# Altium PCB PCB4.PcbDoc
Units mil, origin at the board's own origin, x right, y up, seen from the top; angles counter-clockwise.
Board outline 3370.08 x 2125.2 mil, 2 copper layers (Top Layer, Bottom Layer); 37 components, 0 nets, 137 pads, 19 vias.
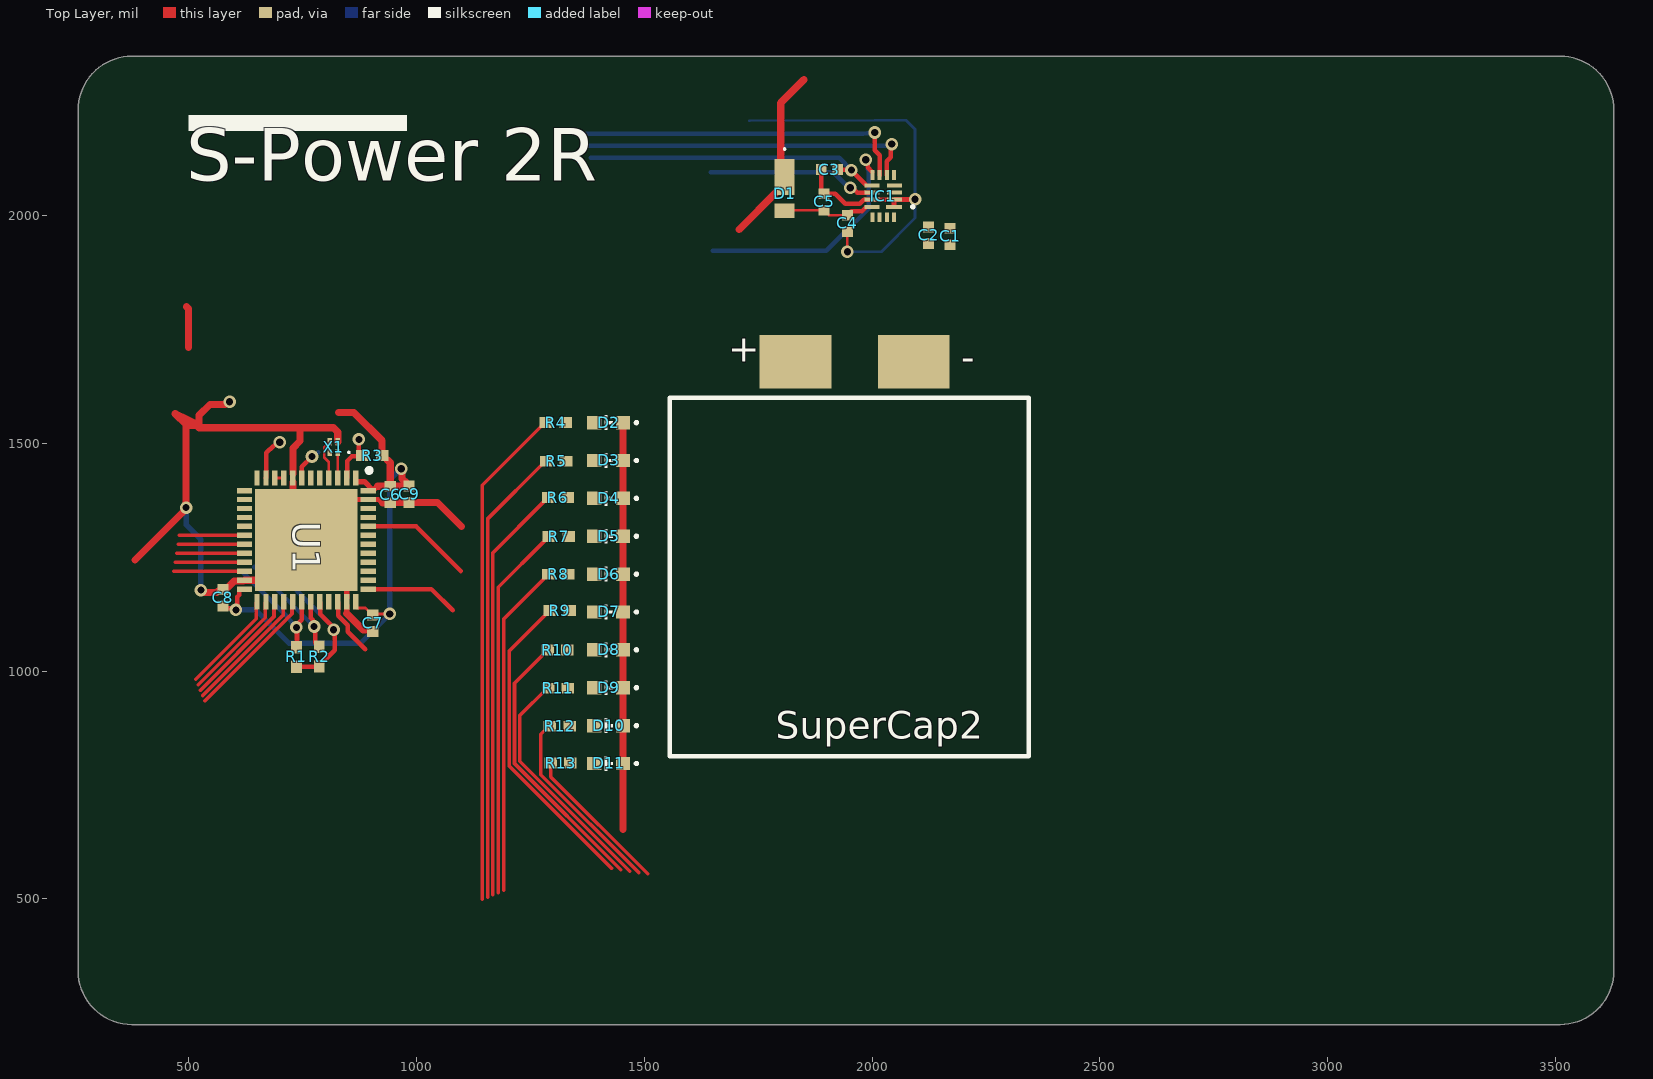
[diagram p0: Top Layer view]
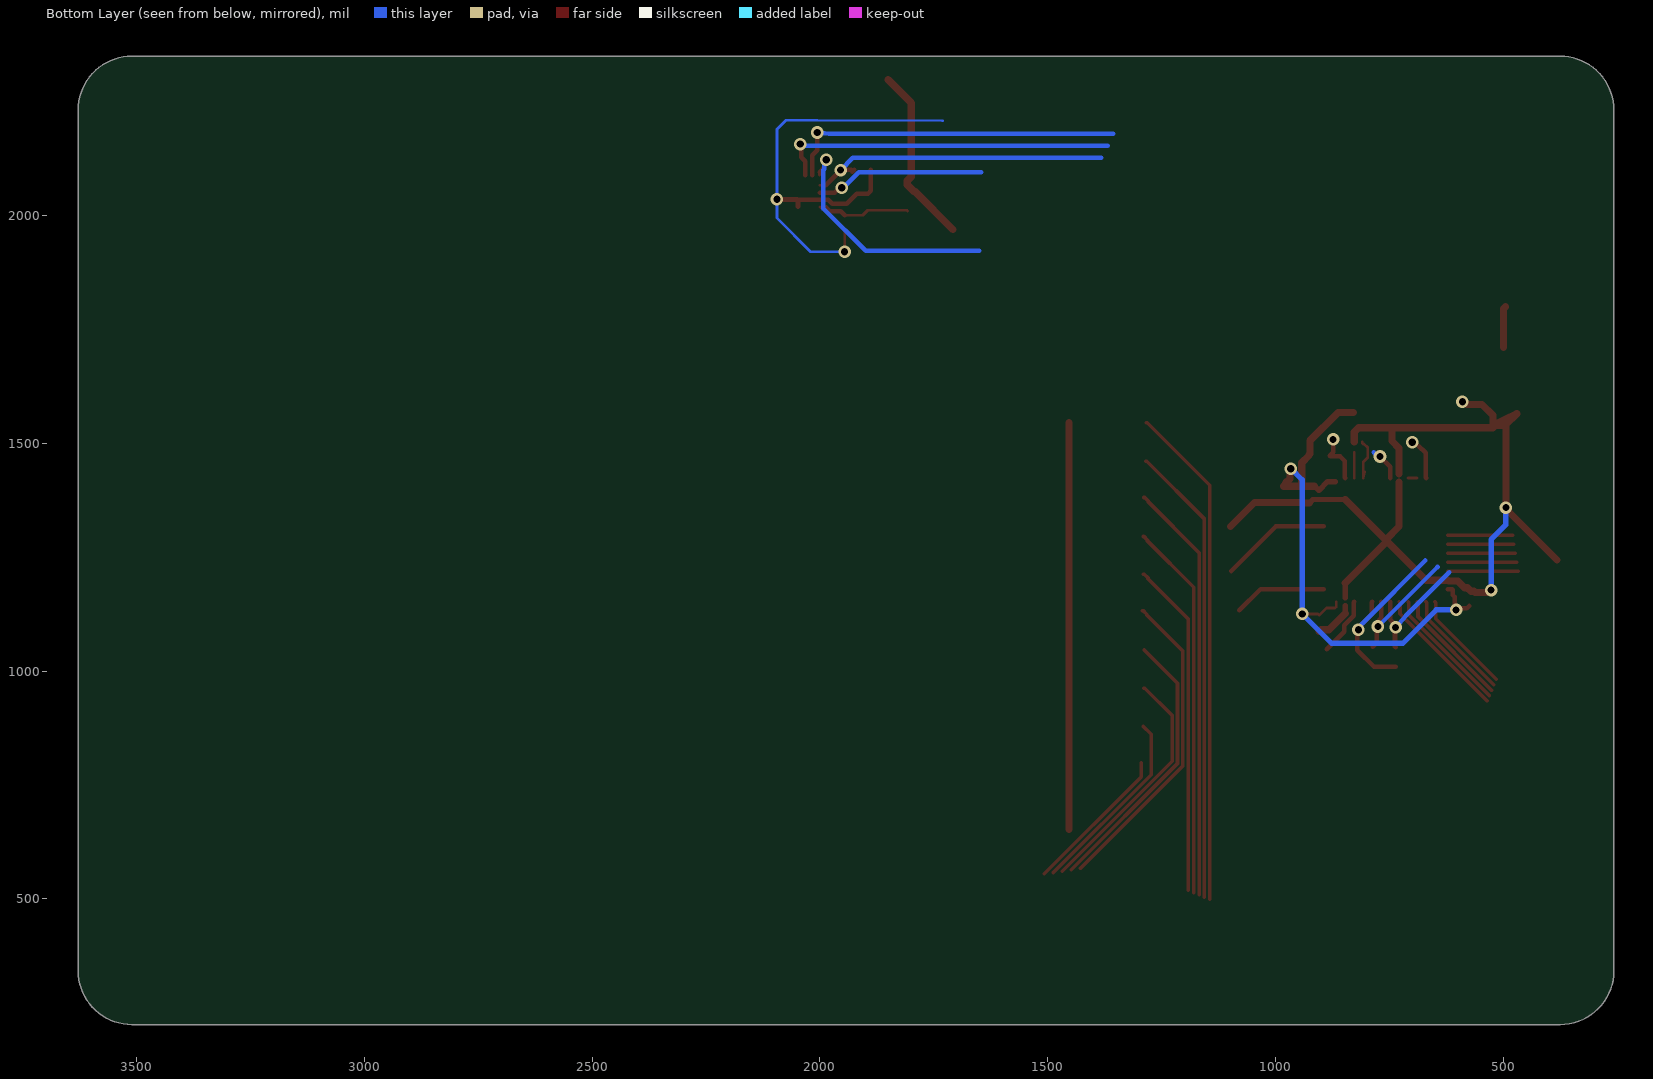
[diagram p1: Bottom Layer view, seen from below]

## Layer stack, top to bottom
Top Solder: solder mask 0.4, Solder Resist, Dk 3.5
Top Layer: signal copper 1.4
Dielectric 1: dielectric 12.6, FR-4, Dk 4.8
Bottom Layer: signal copper 1.4
Bottom Solder: solder mask 0.4, Solder Resist, Dk 3.5

## Board outline
257.87,342.2 257.87,2231.18 cw(c375.98,2231.18) 375.98,2349.29 3509.84,2349.29 cw(c3509.84,2231.18) 3627.95,2231.18 3627.95,342.2 cw(c3509.84,342.2) 3509.84,224.09 375.98,224.09 cw(c375.98,342.2)

## Design rules (kind name [scope] priority, off if disabled: settings)
Clearance [All] p1: gap=10 ignorepadtopadclearanceinfootprint=FALSE except(0: Arc-Hole Track-Hole SMDPad-Hole THPad-Hole Via-Hole Fill-Hole Poly-Hole Region-Hole Text-Hole)
PolygonConnect [All] p1: connectstyle=Relief reliefconductorwidth=10 reliefentries=4 polygonreliefangle="90 Angle" airgapwidth=10
RoutingVias [All] p1: holewidth=28 width=50 viastyle="Through Hole" minholewidth=28 minwidth=50 maxholewidth=28 maxwidth=50
SolderMaskExpansion [All] p1: expansion=4 istentingtop=FALSE
Width [All] p1: maxlimit=10 minlimit=10 preferedwidth=10
30 further rules are at their usual default settings.

## Components (designator, comment, footprint, x,y, rotation, side; value= is the part's Value field where it differs from the comment)
C1 "GRM155C81C474KE01D" CAPC1005X70N 2171.26,1953.54 r270 top value=0F
C2 "GRM155C81C474KE01D" CAPC1005X70N 2124.02,1956.5 r270 top value=0F
C3 "GRM155R61E105KA12D" CAPC1005X55N 1906.5,2100.2 r180 top value=1µF
C4 "C0402C101KCGACAUTO" CAPC1005X70N 1945.87,1982.09 r90 top
C5 "C0402C101KCMBASJ105SB7474KFNA01GACAUTO" CAPC1005X70N 1894.69,2029.33 r270 top
C6 "C0402C475K8PACTU" CAPC1005X70N 942.68,1387.13 r270 top
C7 "MLAST105SB5104KFNA01" CAPC1005X70N 904.29,1104.65 r270 top
C8 "MLAST105SB5104KFNA01" CAPC1005X70N 575.55,1160.75 r90 top
C9 "MLAST105SB5104KFNA01" CAPC1005X70N 984.02,1388.11 r270 top
D1 "RBE01VYM6AFHTR" RBE01VYM6AFHTR 1808.07,2058.86 r180 top
D2 "150060RS55040" WL-SMCD_0603 -48578.07,-48454.92 r180 top
D3 "150060RS55040" WL-SMCD_0603 -48578.07,-48538.04 r180 top
D4 "150060AS55040" WL-SMCD_0603 -48578.07,-48621.15 r180 top
D5 "150060AS55040" WL-SMCD_0603 -48578.07,-48704.27 r180 top
D6 "150060AS55040" WL-SMCD_0603 -48578.07,-48787.38 r180 top
D7 "150060VS55040" WL-SMCD_0603 -48578.07,-48870.49 r180 top
D8 "150060VS55040" WL-SMCD_0603 -48578.07,-48953.61 r180 top
D9 "150060VS55040" WL-SMCD_0603 -48578.07,-49036.72 r180 top
D10 "150060VS55040" WL-SMCD_0603 -48578.07,-49119.84 r180 top
D11 "150060BS55040" WL-SMCD_0603 -48578.07,-49202.95 r180 top
IC1 "NTP53321G0JHKZ" NTP53321G0JHKZ 2024.61,2042.13 r180 top
R1 "CRCW04024K70FKEDHP" RESC1005X40N 736.97,1030.83 r270 top
R2 "CRCW04024K70FKEDHP" RESC1005X40N 787.17,1031.81 r270 top
R3 "CRCW04024K70FKEDHP" RESC1005X40N 903.31,1472.76 r0 top
R4 "SFR01MZPJ470" RESC1005X40N 1305.79,1545.08 r180 top
R5 "SFR01MZPJ470" RESC1005X40N 1306.77,1460.43 r180 top
R6 "SFR01MZPJ470" RESC1005X40N 1310.71,1380.71 r0 top
R7 "SFR01MZPJ470" RESC1005X40N 1312.68,1295.08 r0 top
R8 "SFR01MZPJ470" RESC1005X40N 1311.69,1212.4 r0 top
R9 "SFR01MZPJ470" RESC1005X40N 1314.65,1132.68 r0 top
R10 "SFR01MZPJ470" RESC1005X40N 1309.72,1046.06 r0 top
R11 "SFR01MZPJ470" RESC1005X40N 1310.71,962.4 r0 top
R12 "SFR01MZPJ470" RESC1005X40N 1314.65,878.74 r0 top
R13 "SFR01MZPJ470" RESC1005X40N 1316.61,798.03 r0 top
SuperCap2 "S-Power 2R" "S-Power 2R" 1950,1600 r0 top
U1 "STM32L431CCU6" QFN50P700X700X60-49N-D 758.62,1287.72 r270 top
X1 "WMRAG32K76CS2C00R0" WMRAG32K76CS2C00R0 818.66,1491.46 r90 top

## Footprints (in the part's own frame and the unit in brackets; to place one, negate y for a bottom-side part, rotate by r counter-clockwise, add the part's x,y. Pads: shape width x height; smd on the part's side, far side on the other; paste and mask are expansions set on the pad)
CAPC1005X55N [mm]
  rect 0.6x0.62 smd: 1(-0.46,0) 2(0.46,0)
  body extent -0.5,-0.25 0.5,0.25, height 0.25
CAPC1005X70N [mm]
  rect 0.6x0.62 smd: 1(-0.46,0) 2(0.46,0)
  body extent -0.5,-0.25 0.5,0.25, height 0.5
NTP53321G0JHKZ [mm]
  rect 0.9x0.22 smd: 1(-0.6,0.6)
  rect 0.85x0.22 smd: 2(-0.625,0.2) 3(-0.625,-0.2) 4(-0.625,-0.6) 9(0.625,-0.6) 10(0.625,-0.2) 11(0.625,0.2) 12(0.625,0.6)
  rect 0.22x0.55 smd: 5(-0.6,-1.175) 6(-0.2,-1.175) 7(0.2,-1.175) 8(0.6,-1.175) 13(0.6,1.175) 14(0.2,1.175) 15(-0.2,1.175) 16(-0.6,1.175)
  silkscreen extent -1.7,0.55 -1.6,0.65, body extent -0.9,-1.3 0.9,1.3, height 0.6
QFN50P700X700X60-49N-D [mm]
  rect 0.85x0.3 smd: 1(-3.45,2.75) 2(-3.45,2.25) 3(-3.45,1.75) 4(-3.45,1.25) 5(-3.45,0.75) 6(-3.45,0.25) 7(-3.45,-0.25) 8(-3.45,-0.75) 9(-3.45,-1.25) 10(-3.45,-1.75) 11(-3.45,-2.25) 12(-3.45,-2.75) 25(3.45,-2.75) 26(3.45,-2.25) 27(3.45,-1.75) 28(3.45,-1.25) 29(3.45,-0.75) 30(3.45,-0.25) 31(3.45,0.25) 32(3.45,0.75) 33(3.45,1.25) 34(3.45,1.75) 35(3.45,2.25) 36(3.45,2.75)
  rect 0.3x0.85 smd: 13(-2.75,-3.45) 14(-2.25,-3.45) 15(-1.75,-3.45) 16(-1.25,-3.45) 17(-0.75,-3.45) 18(-0.25,-3.45) 19(0.25,-3.45) 20(0.75,-3.45) 21(1.25,-3.45) 22(1.75,-3.45) 23(2.25,-3.45) 24(2.75,-3.45) 37(2.75,3.45) 38(2.25,3.45) 39(1.75,3.45) 40(1.25,3.45) 41(0.75,3.45) 42(0.25,3.45) 43(-0.25,3.45) 44(-0.75,3.45) 45(-1.25,3.45) 46(-1.75,3.45) 47(-2.25,3.45) 48(-2.75,3.45)
  rect 5.7x5.7 smd: 49(0,0)
  silkscreen extent -4,3.38 -3.75,3.63, body extent -3.55,-3.55 3.55,3.55, height 0.6
RBE01VYM6AFHTR [mm]
  rect 1.1x2 smd: 1(0,-0.65)
  rect 1.1x0.8 smd: 2(0,1.25)
  silkscreen extent -0.05,-2.25 0.05,-2.15, body extent -0.7,-1.25 0.7,1.25, height 0.8
RESC1005X40N [mm]
  rect 0.7x0.6 smd: 1(-0.55,0) 2(0.55,0)
  body extent -0.5,-0.25 0.5,0.25, height 0.4
"S-Power 2R" [mm]
  rect 4x3 smd: 1(-3,2) 2(3.6,2)
  silkscreen extent -10,-20 10,0
WL-SMCD_0603 [mm] "SMD Mono-color Chip LED, body 1.6x0.8mm"
  rect 0.8x0.75 smd: 1(-1270.8,-1270) 2(-1269.2,-1270)
  silkscreen extent -1271.63,-1270.4 -1269.78,-1269.6, body extent -1270.8,-1270.4 -1269.2,-1269.6, height 0.42
WMRAG32K76CS2C00R0 [mm]
  rect 0.4x0.25 smd: 1(-0.3,-0.225) 2(0.3,-0.225) 3(0.3,0.225) 4(-0.3,0.225)
  silkscreen extent -0.35,-0.9 -0.25,-0.8, body extent -0.48,-0.33 0.48,0.33, height 0.45

## Part data
C1 C2: library part CMP-001-00140-1, "Multilayer Ceramic Capacitors MLCC - SMD/SMT", Manufacturer_Name="Murata Electronics", Mouser Part Number=81-GRM155C81C474KE1D, Datasheet Link=https://search.murata.co.jp/Ceramy/image/img/A01X/G101/ENG/GRM155C81C474KE01-01A.pdf, Design Item ID=GRM155C81C474KE01D, Height=0.7mm, Manufacturer_Part_Number=GRM155C81C474KE01D, Mouser Price/Stock=https://www.mouser.com/Search/Refine.aspx?Keyword=81-GRM155C81C474KE1D, Source=SamacSys.SchLib
C3: library part CMP-001-00126-1, "Capacitor", Manufacturer_Name="Murata Electronics", Mouser Part Number=81-GRM155R61E105KA2D, Rated Voltage="25 VDC", Arrow Part Number=GRM155R61E105KA12D, Arrow Price/Stock=https://www.arrow.com/en/products/grm155r61e105ka12d/murata-manufacturing?region=nac, Datasheet Link=https://search.murata.co.jp/Ceramy/image/img/A01X/G101/ENG/GRM155R61E105KA12-01A.pdf, Design Item ID=GRM155R61E105KA12D, Height=0.55mm, Manufacturer_Part_Number=GRM155R61E105KA12D, Mouser Price/Stock=https://www.mouser.co.uk/ProductDetail/Murata-Electronics/GRM155R61E105KA12D?qs=hiffU4J9V6bE4a81t2Mv5A%3D%3D, Source=SamacSys.SchLib
C4: library part "Generic capacitor", "Multilayer Ceramic Capacitors MLCC - SMD/SMT 500V 0.0001uF C0G 0402 10% AEC-Q200", Capacitance=100pF, ComponentLink1Description="New link", ComponentLink1URL=https://www.mouser.se/ProductDetail/KEMET/C0402C101KCGACAUTO?qs=1Kr7Jg1SGW8kQysZZQPmCw%3D%3D
C5: library part "Generic capacitor", "Multilayer Ceramic Capacitors MLCC - SMD/SMT 500V 0.0001uF C0G 0402 10% AEC-Q200", Capacitance=0.47uF, ComponentLink1Description="New link", ComponentLink1URL=https://www.mouser.se/ProductDetail/TAIYO-YUDEN/MBASJ105SB7474KFNA01?qs=tlsG%2FOw5FFh70%252Bw5vm%252Bxgg%3D%3D
C6: library part "Generic capacitor", "Multilayer Ceramic Capacitors MLCC - SMD/SMT", Capacitance=4.7uF, ComponentLink1Description="New link", ComponentLink1URL=https://www.mouser.se/ProductDetail/TAIYO-YUDEN/MLASJ105BB5475MFNA01?qs=sGAEpiMZZMsh%252B1woXyUXj3XUfju0vRpjpyIV14TsoXE%3D
C7 C8 C9: library part "Generic capacitor", "Multilayer Ceramic Capacitors MLCC - SMD/SMT 25V 0.1uF X5R 0402 10% Medical", Capacitance=100nF, ComponentLink1Description="New link", ComponentLink1URL=https://www.mouser.se/ProductDetail/TAIYO-YUDEN/MLAST105SB5104KFNA01?qs=sGAEpiMZZMsh%252B1woXyUXj3XUfju0vRpjIEu19pL458I%3D
D1: library part CMP-004-00062-1, "DIODE SCHOTTKY 6V 100MA TUMD2M", Manufacturer_Name="ROHM Semiconductor", Mouser Part Number=755-RBE01VYM6AFHTR, Datasheet Link=https://www.digikey.ph/en/products/detail/rohm-semiconductor/RBE01VYM6AFHTR/24634517, Design Item ID=RBE01VYM6AFHTR, Height=0.8mm, Manufacturer_Part_Number=RBE01VYM6AFHTR, Mouser Price/Stock=https://www.mouser.co.uk/ProductDetail/ROHM-Semiconductor/RBE01VYM6AFHTR?qs=VVKQmw408U8czvswzPLZtQ%3D%3D, Source=SamacSys.SchLib
D2 D3: library part CMP-207942-000007-3, "LED RED DIFFUSED 0603 SMD", Case/Package=0603, Color=Red, Forward Current=40mA, Forward Voltage=2V, Max Junction Temperature (Tj)=115°C, Max Operating Temperature=85°C, Max Reverse Voltage (DC)=5V, Min Operating Temperature=-40°C, Power Dissipation=48mW, Dominant Wavelength=624nm, Height=400µm, Length=1.6mm, Luminous Intensity=90mcd, NexarPartId=90235565, Packaging="Tape and Reel", Peak Wavelength=632nm, Reverse Voltage=5V, RoHS=Compliant, Viewing Angle=140°, Wavelength=624nm, Width=800µm
D4 D5 D6: library part CMP-03913-134708025-1, "150060AS55040 WL-SMCD SMT Mono-color Chip LED Diffused", Forward Current=40mA, Forward Voltage=2V, Max Operating Temperature=85°C, Max Reverse Voltage (DC)=5V, Min Operating Temperature=-40°C, Dominant Wavelength=605nm, Luminous Intensity=110mcd, NexarPartId=134708025, Peak Wavelength=609nm, Viewing Angle=140°
D7 D8 D9 D10: library part CMP-03913-90235568-2, "150060VS55040 WL-SMCD SMT Mono-color Chip LED Diffused", Case/Package=0603, Color=Green, Forward Current=40mA, Forward Voltage=2V, Max Junction Temperature (Tj)=115°C, Max Operating Temperature=85°C, Max Reverse Voltage (DC)=5V, Min Operating Temperature=-40°C, Power Dissipation=48mW, Dominant Wavelength=573nm, Height=400µm, Length=1.6mm, Luminous Intensity=60mcd, NexarPartId=90235568, Packaging="Tape and Reel", Peak Wavelength=575nm, Reverse Voltage=5V, RoHS=Compliant, Viewing Angle=140°, Wavelength=573nm, Width=800µm
D11: library part CMP-03913-90235561-2, "150060BS55040 WL-SMCD SMT Mono-color Chip LED Diffused", Forward Current=60mA, Forward Voltage=3.2V, Max Operating Temperature=85°C, Max Reverse Voltage (DC)=5V, Min Operating Temperature=-40°C, Dominant Wavelength=470nm, Height=400µm, Length=1.6mm, Luminous Intensity=80mcd, NexarPartId=90235561, Packaging="Tape and Reel", Peak Wavelength=465nm, RoHS=Compliant, Viewing Angle=140°, Wavelength=470nm, Width=800µm
IC1: library part CMP-031-00011-1, "Interface - Specialized NTAG", Manufacturer_Name=NXP, Mouser Part Number=771-NTP53321G0JHKZ, Arrow Part Number=NTP53321G0JHKZ, Arrow Price/Stock=https://www.arrow.com/en/products/ntp53321g0jhkz/nxp-semiconductors?region=nac, Datasheet Link=https://www.nxp.com/docs/en/data-sheet/NTP53x2.pdf, Design Item ID=NTP53321G0JHKZ, Height=0.5mm, Manufacturer_Part_Number=NTP53321G0JHKZ, Mouser Price/Stock=https://www.mouser.co.uk/ProductDetail/NXP-Semiconductors/NTP53321G0JHKZ?qs=u16ybLDytRYy2Rt%2Fib73Dw%3D%3D, Source=SamacSys.SchLib
R1 R2 R3: library part CMP-009-00230-1, "CRCW Power Resistor 0402 0.063W 4K7 Vishay CRCW Series Thick Film Power Resistor 0402 Case 4.7k +/-1% 0.125W +/-100ppm/K", Manufacturer_Name=Vishay, Mouser Part Number=71-CRCW04024K70FKEDH, Resistance=4.7k, Arrow Part Number=CRCW04024K70FKEDHP, Arrow Price/Stock=https://www.arrow.com/en/products/crcw04024k70fkedhp/vishay?utm_currency=USD&region=nac, Datasheet Link=http://www.vishay.com/docs/20035/dcrcwe3.pdf, Design Item ID=CRCW04024K70FKEDHP, Height=0.4mm, Manufacturer_Part_Number=CRCW04024K70FKEDHP, Mouser Price/Stock=https://www.mouser.co.uk/ProductDetail/Vishay-Dale/CRCW04024K70FKEDHP?qs=k2%2FDWSARqgH3ASlI4vM3KQ%3D%3D, Source=SamacSys.SchLib
R4 R5 R6 R7 R8 R9 R10 R11 R12 R13: library part "Generic resistor", "Thick Film Resistors Sulfur Tolerant Chip Resistors 0402 case size", Resistance=47, ComponentLink1Description="New link", ComponentLink1URL=https://www.mouser.se/ProductDetail/ROHM-Semiconductor/SFR01MZPJ470?qs=sGAEpiMZZMvdGkrng054t2cqbZCzJY7NKh3gUwXOa5kuN5TNJ%252Bi2TA%3D%3D
SuperCap2: library part CMP-111-000001-1, Design Item ID="S-Power 2R", Source=Schlib.SchLib
U1: library part CMP-031-00018-1, "ARM Microcontrollers - MCU 16/32-BITS MICROS", Manufacturer_Name=STMicroelectronics, Mouser Part Number=511-STM32L431CCU6, Arrow Part Number=STM32L431CCU6, Arrow Price/Stock=https://www.arrow.com/en/products/stm32l431ccu6/stmicroelectronics?region=nac, Datasheet Link=http://www.st.com/content/ccc/resource/technical/document/datasheet/group3/83/b3/60/f6/b1/cc/47/7e/DM00257211/files/DM00257211.pdf/jcr:content/translations/en.DM00257211.pdf, Design Item ID=STM32L431CCU6, Height=0.6mm, Manufacturer_Part_Number=STM32L431CCU6, Mouser Price/Stock=https://www.mouser.co.uk/ProductDetail/STMicroelectronics/STM32L431CCU6?qs=U58vgkJzipRWiXTJcDrRbg%3D%3D, Source=SamacSys.SchLib
X1: library part CMP-003-00031-1, "32.768 kHz +/-20ppm Crystal 8pF 75 kOhms 4-SMD", Manufacturer_Name="Murata Electronics", Mouser Part Number=81-WMRAG32K76CS2C00R, Datasheet Link=https://www.murata.com/products/productdata/8804604674078/SPEC-WMRAG32K76CS2C00R0.pdf, Design Item ID=WMRAG32K76CS2C00R0, Height=0.35mm, Manufacturer_Part_Number=WMRAG32K76CS2C00R0, Mouser Price/Stock=https://www.mouser.co.uk/ProductDetail/Murata-Electronics/WMRAG32K76CS2C00R0?qs=bZr6mbWTK5kWV2uyypDEfg%3D%3D, Source=SamacSys.SchLib

## Via types
v1: diameter 27.56, hole 15.75, Top Layer to Bottom Layer, tented both sides, 19 vias

## Nets (pads, with @x,y where several pads share a name; then routed paths per layer and width w, separated by ;. In a path a pad name is that pad's centre, name@x,y a point inside that pad or via, vN(x,y) a via of type N, cw(c..) or ccw(c..) an arc to the next point about the centre after c; other vN are vias at no path point)
pads on no net: C1.1 C1.2 C2.1 C2.2 C3.1 C3.2 C4.1 C4.2 C5.1 C5.2 C6.1 C6.2 C7.1 C7.2 C8.1 C8.2 C9.1 C9.2 D1.1 D1.2 D2.1 D2.2 D3.1 D3.2 D4.1 D4.2 D5.1 D5.2 D6.1 D6.2 D7.1 D7.2 D8.1 D8.2 D9.1 D9.2 D10.1 D10.2 D11.1 D11.2 IC1.1 IC1.2 IC1.3 IC1.4 IC1.5 IC1.6 IC1.7 IC1.8 IC1.9 IC1.10 IC1.11 IC1.12 IC1.13 IC1.14 IC1.15 IC1.16 R1.1 R1.2 R2.1 R2.2 R3.1 R3.2 R4.1 R4.2 R5.1 R5.2 R6.1 R6.2 R7.1 R7.2 R8.1 R8.2 R9.1 R9.2 R10.1 R10.2 R11.1 R11.2 R12.1 R12.2 R13.1 R13.2 SuperCap2.1 SuperCap2.2 U1.1 U1.2 U1.3 U1.4 U1.5 U1.6 U1.7 U1.8 U1.9 U1.10 U1.11 U1.12 U1.13 U1.14 U1.15 U1.16 U1.17 U1.18 U1.19 U1.20 U1.21 U1.22 U1.23 U1.24 U1.25 U1.26 U1.27 U1.28 U1.29 U1.30 U1.31 U1.32 U1.33 U1.34 U1.35 U1.36 U1.37 U1.38 U1.39 U1.40 U1.41 U1.42 U1.43 U1.44 U1.45 U1.46 U1.47 U1.48 U1.49 X1.1 X1.2 X1.3 X1.4
copper on no net: | length 20622.4
  Top Layer w6.06: 575.55,1142.64 575.94,1142.64 ; 689.72,1423.54 709.41,1423.54 ; 804.96,1437.24 807.83,1423.54 807.83,1458.86 797.91,1468.79 797.91,1490.41 805.93,1498.43 807.91,1498.43 809.8,1500.32 809.8,1503.27 ; 827.52,1423.54 827.52,1479.65 ; 866.89,1151.89 866.89,1141.06 869.76,1138.19 888.46,1138.19 903.9,1122.76 904.29,1122.76 906.85,1125.32 v1(941.69,1125.32) ; 1808.07,2009.65 1809.65,2011.22 1894.69,2011.22 1895.08,2011.22 1906.1,2000.2 1945.87,2000.2 ; v1(1945.87,1920.08) 1945.87,1963.98 ; v1(1954.66,2099.28) 1954.66,2095.34 1957.68,2092.32 v1@1961.02,2092.32 ; v1(1986.22,2121.85) v1@1990.33,2117.74 ; 1986.3,2017.2 1998.7,2017.2 2000,2018.5 ; 1987.6,2065.75 2000,2065.75 ; 2000.98,2088.39 2000.98,2094.88
  Top Layer w7.87: 468.27,1218.82 622.8,1218.82 ; 471.25,1238.5 622.8,1238.5 ; 474.23,1258.19 622.8,1258.19 ; 477.21,1277.87 622.8,1277.87 ; 480.08,1297.56 622.8,1297.56 ; 515.63,981.73 648.39,1114.49 648.39,1149.92 650.35,1151.89 ; 521.54,969.92 668.2,1116.58 668.2,1150.05 670.04,1151.89 ; 526.46,958.11 687.76,1119.41 687.76,1149.92 689.72,1151.89 ; 531.35,946.3 708.4,1123.35 708.4,1150.88 709.41,1151.89 ; 536.24,934.49 727.13,1125.37 727.13,1149.92 729.09,1151.89 ; 1144.49,498.76 1144.49,1407.4 1282.17,1545.08 1284.13,1545.08 ; 1156.3,503.65 1156.3,1333.58 1283.15,1460.43 1285.12,1460.43 ; 1168.11,508.54 1168.11,1259.76 1279.21,1370.87 1279.21,1372.83 1287.09,1380.71 1289.06,1380.71 ; 1179.92,513.46 1179.92,1183.98 1281.18,1285.24 1281.18,1287.2 1289.06,1295.08 1291.02,1295.08 ; 1191.73,519.37 1191.73,1114.09 1280.2,1202.56 1280.2,1204.53 1288.07,1212.4 1290.04,1212.4 ; 1288.07,1046.06 1215.35,973.35 1215.35,796.9 1448.5,563.75 ; 1289.06,962.4 1287.09,962.4 1227.17,902.48 1227.17,801.79 1468.19,560.77 ; 1291.02,878.74 1273.31,861.02 1273.31,772.35 1487.87,557.79 ; 1292.99,1132.68 1291.02,1132.68 1283.15,1124.8 1283.15,1122.83 1203.54,1043.23 1203.54,792.01 1428.82,566.73 ; 1294.96,798.03 1294.96,767.52 1507.56,554.92
  Top Layer w10: 575.55,1142.64 580.66,1137.53 600.73,1137.53 v1(604.09,1134.17) 607.45,1137.53 607.45,1162.67 611.59,1166.8 611.59,1178.54 612.49,1179.45 622.8,1179.45 ; 670.04,1423.54 670.94,1424.45 670.94,1479.16 678.02,1486.23 679.76,1486.23 695.65,1502.13 v1(700.4,1502.13) ; v1(736.8,1095.61) 736.8,1100.37 748.78,1112.35 748.78,1151.89 ; 736.97,1009.17 784.21,1009.17 820.63,1045.59 v1@820.63,1093.45 ; 736.97,1052.48 738.19,1053.7 v1@738.19,1097.01 ; 748.78,1423.54 748.78,1448.46 v1(771.1,1470.79) ; 768.46,1151.89 768.46,1116.26 772.38,1112.34 772.38,1101 v1(775.74,1097.64) ; v1@778.2,1100.71 778.2,1077.59 778.39,1077.4 778.39,1062.24 787.17,1053.46 ; 788.15,1151.89 789.06,1150.98 789.06,1125.02 804.52,1109.56 804.52,1109.25 818.41,1095.36 v1(818.41,1090.61) ; 827.52,1151.89 828.43,1150.98 828.43,1121.3 849.41,1100.31 849.41,1085.89 887.74,1047.56 ; 847.2,1423.54 848.11,1424.45 848.11,1460.87 858.73,1471.49 880.39,1471.49 881.65,1472.76 873.91,1480.5 v1(873.91,1508.38) ; 894.45,1179.45 1033.23,1179.45 1079.68,1132.99 ; 894.45,1317.24 999.76,1317.24 1097.6,1219.41 ; 1888.39,2100.2 1888.39,2053.74 1894.69,2047.44 1919.54,2047.44 1941.58,2025.39 1973.19,2025.39 1982.05,2034.25 2000,2034.25 2049.21,2034.25 ; 1924.61,2099.8 1928.73,2095.68 1928.73,2097.05 1931.42,2099.74 1953.52,2099.74 v1@1954.32,2098.94 ; 1945.87,2000.2 1954.65,2008.98 1978.07,2008.98 1986.3,2017.2 ; v1(1952.33,2060.32) 1957.08,2060.32 1967.4,2050 2000,2050 ; v1(1954.66,2099.28) 1954.66,2095.34 v1@1957.68,2092.32 ; v1@1961.02,2092.32 1987.6,2065.75 ; v1@1990.33,2117.74 1990.33,2105.53 2000.98,2094.88 ; v1(2005.91,2181.72) 2005.91,2142.87 2016.73,2132.04 2016.73,2088.39 ; 2032.48,2088.39 2032.48,2118.99 2041.01,2127.52 2041.01,2154.01 v1(2043.31,2156.3) ; 2048.23,2018.5 2048.23,2033.27 2049.21,2034.25 ; v1(2094.49,2035.24) 2094,2034.74 2049.7,2034.74 2049.21,2034.25
  Top Layer w11.81: 847.2,1126.29 847.2,1143.03 ; 847.2,1160.75 847.2,1193.24 ; 847.2,1376.3 918.27,1376.3 925.55,1369.02 ; 868.86,1415.49 886.17,1415.49 905.3,1396.35 914.55,1405.61
  Top Layer w15.75: 382.64,1243.43 v1@494.84,1355.63 ; v1(494.84,1358.58) 494.84,1533.78 494.84,1538.7 ; 495.85,1799.5 500.13,1795.23 500.13,1709.99 ; 496.22,1539.29 523.38,1539.29 ; v1(527.32,1177.48) 530.52,1177.48 535.74,1172.26 562,1172.26 564.65,1174.92 571.61,1174.92 579.49,1182.8 585.78,1182.8 600.15,1197.17 620.83,1197.17 622.8,1199.13 670.04,1199.13 758.62,1287.72 ; v1(590.08,1590.87) 586.88,1590.87 580.98,1584.96 547.01,1584.96 523.38,1561.33 523.38,1539.69 470.93,1564.59 495.83,1539.69 517.48,1539.69 523.38,1533.78 744.83,1533.78 ; 729.09,1414.69 729.09,1317.24 758.62,1287.72 ; 729.09,1432.4 729.09,1488.74 744.83,1504.48 744.83,1533.78 ; 758.62,1281.82 847.2,1193.24 ; 827.51,1503.28 827.51,1524.55 818.29,1533.78 744.83,1533.78 ; 829.23,1567.43 862.77,1567.43 924.98,1505.21 924.98,1476.69 926.95,1474.72 926.95,1472.73 942.7,1456.98 942.7,1405.26 ; 847.2,1126.29 883.02,1090.47 900.35,1090.47 904.29,1086.54 ; 847.2,1376.3 758.62,1287.72 ; 914.55,1405.61 942.31,1405.61 ; 925.55,1369.02 942.68,1369.02 ; 941.69,1370 984.02,1370 1046.42,1370 1099.07,1317.35 ; 943.05,1405.61 983.06,1405.61 ; v1(966.88,1443.98) 968.65,1442.2 968.65,1421.98 977.72,1412.91 ; 1453.43,652.36 1453.43,797.05 1453.43,880.16 1453.43,963.28 1453.43,1046.39 1453.43,1129.51 1453.43,1212.62 1453.43,1295.73 1453.43,1378.85 1453.43,1461.96 1453.43,1545.08 ; 1707.86,1968.56 1792.25,2052.95 1794.29,2052.95 1808.44,2067.1 1808.44,2075.85 1799.58,2084.71 1799.58,2246.83 1850.42,2297.67
  Bottom Layer w6.06: 1731.3,2207.72 2005.83,2208.53 2074.74,2208.53 2094.49,2188.78 v1(2094.49,2035.24) 2094.49,1993.9 2020.67,1920.08 v1(1945.87,1920.08)
  Bottom Layer w10: 618.86,1216.34 714.3,1120.89 v1(736.8,1095.61) ; 644.86,1228.25 775.47,1097.64 v1(775.74,1097.64) ; 671.62,1242.46 804.52,1109.56 804.52,1109.25 818.41,1095.36 v1(818.41,1090.61) ; v1(700.4,1502.13) v1@703.58,1505.31 ; v1(771.1,1470.79) 775.85,1470.79 784.66,1479.6 ; v1(873.91,1508.38) v1@875.75,1510.21 ; 1356.77,2178.94 1980.41,2178.94 v1(2005.91,2181.72) ; 1368.69,2152.94 2039.95,2152.94 v1(2043.31,2156.3) ; 1382.89,2126.17 1927.77,2126.17 v1(1954.66,2099.28) ; 1645.74,2094.21 1915.09,2094.21 1948.98,2060.32 v1(1952.33,2060.32) ; 1650.64,1922.05 1899.61,1922.05 1992.36,2014.8 1992.36,2099.49 1990.33,2101.52 1990.33,2117.74 v1(1986.22,2121.85)
  Bottom Layer w11.81: v1(494.84,1358.58) 494.84,1321.15 527.32,1288.67 v1(527.32,1177.48) ; v1(604.09,1134.17) 647.61,1134.17 720.86,1060.93 877.31,1060.93 v1(941.69,1125.32) 941.69,1419.3 966.37,1443.98 v1(966.88,1443.98)

## Silkscreen, mask and mechanical layers (free items; w line width, h text height)
Top Overlay:
  rectangle: 500,2185 980,2220
  text "S-Power 2R" at 495,2037.3 h196.85
Mechanical 1:
  the board outline again, w10

## Text inside footprints (layer, text, board x,y; h text height)
SuperCap2: Top Overlay "+" at 1684.41,1678.74 h60; Top Overlay "-" at 2196.22,1658.75 h60